# EAGLE board CT_schematic (EAGLE 7.6.0)

Size 100 x 80 mm. Coordinates in mm from the lower left corner, seen from the top.
Outline: 0,0 100,0 100,80 0,80 0,0
Copper layers (1*16): Top 0.035mm / dielectric 1.5mm / Bottom 0.035mm
Design rules "default": minimum track width 10mil, minimum drill 24mil, track to track 8mil, track to pad 8mil, pad to pad 8mil, via to via 8mil, smd to smd 8mil, copper to edge 40mil, drill to drill 8mil, minimum pad ring 10mil, minimum via ring 8mil, stop-mask expansion 4mil, vias tented up to drill 0mil, thermal gap 10mil

## Footprints (pad centres in the part's own frame; a part is rotated, then mirrored left to right if it is on the bottom)
C0603 = smd 0.8 x 0.8: 1 -0.762,0; 2 0.762,0
C0402 = smd 0.5 x 0.5: 1 -0.508,0; 2 0.508,0
C1210 = smd 1.2 x 2.5: 1 -1.524,0; 2 1.524,0
C1206 = smd 1.3 x 1.6: 1 -1.524,0; 2 1.524,0
L0603 = smd 0.8 x 0.8: 1 -0.762,0; 2 0.762,0
R0603 = smd 0.8 x 0.8: 1 -0.762,0; 2 0.762,0
LQFP32 = smd 0.54 x 0.85: 1 -2.8,-4.275; 2 -2,-4.275; 3 -1.2,-4.275; 4 -0.4,-4.275; 5 0.4,-4.275; 6 1.19,-4.275; 7 1.99,-4.275; 8 2.79,-4.275; 17 2.8,4.275; 18 2,4.275; 19 1.2,4.275; 20 0.4,4.275; 21 -0.4,4.275; 22 -1.2,4.275; 23 -2,4.275; 24 -2.8,4.275 | smd 0.85 x 0.54: 9 4.275,-2.8; 10 4.275,-2; 11 4.275,-1.2; 12 4.275,-0.4; 13 4.275,0.4; 14 4.275,1.2; 15 4.275,2; 16 4.275,2.8; 25 -4.275,2.8; 26 -4.275,2; 27 -4.275,1.2; 28 -4.275,0.4; 29 -4.275,-0.4; 30 -4.275,-1.2; 31 -4.275,-2; 32 -4.275,-2.8
SOIC-8 = smd 1.6 x 0.6: 1 -2.7,1.905 | smd 1.55 x 0.6: 2 -2.7,0.635; 3 -2.7,-0.635; 4 -2.7,-1.905; 5 2.7,-1.905; 6 2.7,-0.635; 7 2.7,0.635; 8 2.7,1.905
FCI_10118193-0001LF = smd 0.4 x 1.35: 1 -1.3,2.675; 2 -0.65,2.675; 3 0,2.675; 4 0.65,2.675; 5 1.3,2.675 | smd 1.6 x 1.4: 6 -3.2,2.45; 7 3.2,2.45 | smd 1.9 x 1.9: 8 -1.2,0; 9 1.2,0 | hole 0.5: -3.3,0; 3.3,0
SOT143B = smd 1 x 0.7: 1 -0.75,-1 | smd 0.6 x 0.7: 2 0.95,-1; 3 0.95,1; 4 -0.95,1
ABS07-32.768KHZ-7-T = smd 1.1 x 2.4: 1 -2.5,0; 2 0,0
SOIC-8_EP = smd 1.6 x 0.533: 1 -2.921,1.905; 2 -2.921,0.635; 3 -2.921,-0.635; 4 -2.921,-1.905; 5 2.921,-1.905; 6 2.921,-0.635; 7 2.921,0.635; 8 2.921,1.905 | smd 2.54 x 3.302: EPAD 0,0 | drill 0.406 pad 0.406: P$1 -0.508,0.635; P$2 0.381,0.635; P$3 -0.508,-0.635; P$4 0.381,-0.635
DFN8_2X3MC = smd 0.813 x 0.305: 1 -1.398,0.75; 2 -1.398,0.25; 3 -1.398,-0.25; 4 -1.398,-0.75; 5 1.398,-0.75; 6 1.398,-0.25; 7 1.398,0.25; 8 1.398,0.75 | smd 1.753 x 1.549: 9 0,0
JST-2-SMD = smd 1 x 4.6: 1 -1,-3.7; 2 1,-3.7 | smd 1.6 x 3.4: NC1 -3.4,1.5; NC2 3.4,1.5
SON-6 = smd 0.55 x 0.3: 1 -0.355,0.5 | smd 0.52 x 0.3: 2 -0.37,0; 3 -0.37,-0.5; 4 0.37,-0.5; 5 0.37,0; 6 0.37,0.5
SW_4-1437565-2 = smd 1.4 x 2.1: 1 -2.23,4.55; 2 -2.23,-4.55; 3 2.23,4.55; 4 2.23,-4.55
LGM67K-G1J2-24-Z = smd 0.8 x 1.4: A -2,0; C 0,0
NC7SZ125M5X = smd 1.3 x 0.7: 1 -1.3,0.95; 2 -1.3,0; 3 -1.3,-0.95; 4 1.3,-0.95; 5 1.3,0.95
DUMMY_PACKAGE_101 = drill 0.3: 1 0,-1; 2 1.5,-1; 3 3,-1

## Placement (x,y rotation side)
C1  1e-07  [C0603]  -38.1,46.99 0 top  (outside the outline)
C2  1e-07  [C0603]  -41.91,46.99 0 top  (outside the outline)
C3  1e-07  [C0603]  -45.72,46.99 0 top  (outside the outline)
C4  1e-07  [C0603]  -49.53,46.99 0 top  (outside the outline)
C5  4.7e-06  [C0603]  -34.29,46.99 0 top  (outside the outline)
C6  1e-08  [C0603]  -53.34,46.99 0 top  (outside the outline)
C7  1e-06  [C0603]  -57.15,46.99 0 top  (outside the outline)
C8  1e-11  [C0402]  -38.1,52.07 0 top  (outside the outline)
C9  1e-11  [C0402]  -41.91,52.07 0 top  (outside the outline)
C10  1e-08  [C0402]  -45.72,52.07 0 top  (outside the outline)
C11  1e-05  [C1210]  -16.51,36.83 0 top  (outside the outline)
C12  1e-05  [C1210]  -22.86,36.83 0 top  (outside the outline)
C13  1e-05  [C1210]  -29.21,36.83 0 top  (outside the outline)
C14  1e-05  [C1210]  -35.56,36.83 0 top  (outside the outline)
C15  1e-07  [C0402]  -49.53,52.07 0 top  (outside the outline)
C16  1e-05  [C1206]  -41.91,36.83 0 top  (outside the outline)
C17  1e-05  [C1206]  -48.26,36.83 0 top  (outside the outline)
C18  1e-08  [C0402]  -53.34,52.07 0 top  (outside the outline)
F1  240.0  [L0603]  -15.24,52.07 0 top  (outside the outline)
R1  10000.0  [R0603]  -34.29,41.91 0 top  (outside the outline)
R2  1000.0  [R0603]  -19.05,52.07 0 top  (outside the outline)
R3  910.0  [R0603]  -22.86,52.07 0 top  (outside the outline)
R4  4700.0  [R0603]  -26.67,52.07 0 top  (outside the outline)
R5  10000.0  [R0603]  -39.37,41.91 0 top  (outside the outline)
R6  10000.0  [R0603]  -44.45,41.91 0 top  (outside the outline)
R7  10000.0  [R0603]  -49.53,41.91 0 top  (outside the outline)
R8  10000.0  [R0603]  -54.61,41.91 0 top  (outside the outline)
R9  1402.2764227642  [R0603]  -19.05,41.91 0 top  (outside the outline)
R10  2200.0  [R0603]  -30.48,52.07 0 top  (outside the outline)
R11  10000.0  [R0603]  -15.24,46.99 0 top  (outside the outline)
R12  10000.0  [R0603]  -20.32,46.99 0 top  (outside the outline)
R13  82000.0  [R0603]  -25.4,46.99 0 top  (outside the outline)
R14  300000.0  [R0603]  -24.13,41.91 0 top  (outside the outline)
R15  120000.0  [R0603]  -29.21,41.91 0 top  (outside the outline)
R16  2000.0  [R0603]  -34.29,52.07 0 top  (outside the outline)
R17  10000.0  [R0603]  -30.48,46.99 0 top  (outside the outline)
U1  STM32L072KZT6  [LQFP32]  -24.13,7.62 0 top  (outside the outline)
U2  AT25256B-SSHL-T  [SOIC-8]  -39.37,20.32 0 top  (outside the outline)
U3  10118193-0001LF  [FCI_10118193-0001LF]  -49.53,17.78 0 top  (outside the outline)
U4  prtr5v0u2ax  [SOT143B]  -24.13,57.15 0 top  (outside the outline)
U5  ABS07-32.768KHZ-7-T  [ABS07-32.768KHZ-7-T]  -27.94,29.21 0 top  (outside the outline)
U6  MIC5234YME  [SOIC-8_EP]  -36.83,29.21 0 top  (outside the outline)
U7  MCP73831T-2ACI/MC  [DFN8_2X3MC]  -39.37,55.88 0 top  (outside the outline)
U8  S2B-PH-SM4-TB(LF)(SN)  [JST-2-SMD]  -22.86,21.59 0 top  (outside the outline)
U9  TPS3895ADRYR  [SON-6]  -33.02,55.88 0 top  (outside the outline)
U10  4-1437565-2  [SW_4-1437565-2]  -44.45,6.35 0 top  (outside the outline)
U11  Q65110A2395  [LGM67K-G1J2-24-Z]  -45.72,29.21 0 top  (outside the outline)
U12  nc7sz125m5x  [NC7SZ125M5X]  -53.34,35.56 0 top  (outside the outline)
U13  Dummy  [DUMMY_PACKAGE_101]  -30.48,57.15 0 top  (outside the outline)

## Library data of the parts
C1-C18 F1 R1-R17 U1-U13 = circuit_tree

## Nets
CLK_CRYSTAL_U1_2: C8.1 U1.2 U5.1
CLK_CRYSTAL_U1_3: C9.1 U1.3 U5.2
GND: C1.2 C2.2 C3.2 C4.2 C5.2 C6.2 C7.2 C8.2 C9.2 C10.2 C11.2 C12.2 C13.2 C14.2 C15.2 C16.2 C17.2 C18.2 R2.2 R5.2 R10.2 R13.2 R15.2 R16.2 U1.16 U1.32 U2.4 U3.5 U3.6 U3.7 U3.8 U3.9 U4.1 U6.7 U6.EPAD U7.6 U7.9 U8.2 U9.2 U11.C U12.1 U12.3 U13.1
INPUT_USBPOWER_5V: C16.1 R17.2 U3.1 U4.4 U7.1 U7.2
NET_U1_4: R4.1 U1.4 U12.4
NET_U1_5: C6.1 C7.1 F1.1 U1.5
NET_U1_29: R3.1 U1.29 U11.A
NET_U1_30: R1.1 U1.30 U10.3 U10.4
NET_U1_31: R5.1 U1.31
NET_U2_3: R6.1 U2.3
NET_U2_7: R8.1 U2.7
NET_U6_4: R9.2 R10.1 U6.4
NET_U7_5: R17.1 U7.5
NET_U7_8: R16.1 U7.8
NET_U9_1: R12.1 R13.1 U9.1
NET_U9_3: R14.2 R15.1 U9.3
NET_U9_4: R11.1 U9.4 U12.2
NET_U10_1: R2.1 U10.1 U10.2
PROC_PA0: U1.6 U13.2
PROC_PA1: U1.7 U13.3
PROC_SPI1_MISO: U1.12 U2.2
PROC_SPI1_MOSI: U1.13 U2.5
PROC_SPI1_NSS: R7.1 U1.10 U2.1
PROC_SPI1_SCK: U1.11 U2.6
PROC_USB_DM: U1.21 U3.2 U4.3
PROC_USB_DP: U1.22 U3.3 U4.2
VCC_S1_3V7: C11.1 C12.1 C17.1 U6.5 U6.8 U7.3 U7.4 U8.1
VCC_TIER1_1V8: C1.1 C2.1 C3.1 C4.1 C5.1 C10.1 C13.1 C14.1 C15.1 C18.1 F1.2 R1.2 R3.2 R4.2 R6.2 R7.2 R8.2 R9.1 R11.2 R12.2 R14.1 U1.1 U1.17 U2.8 U6.1 U9.6 U12.5

## Tracks (layer width: path | path; a pad name or v marks a point on that pad's centre or on a via)
CLK_CRYSTAL_U1_2  (2 unrouted)
CLK_CRYSTAL_U1_3  (2 unrouted)
GND  (42 unrouted)
INPUT_USBPOWER_5V  (5 unrouted)
NET_U1_4  (2 unrouted)
NET_U1_5  (3 unrouted)
NET_U1_29  (2 unrouted)
NET_U1_30  (3 unrouted)
NET_U1_31  (1 unrouted)
NET_U2_3  (1 unrouted)
NET_U2_7  (1 unrouted)
NET_U6_4  (2 unrouted)
NET_U7_5  (1 unrouted)
NET_U7_8  (1 unrouted)
NET_U9_1  (2 unrouted)
NET_U9_3  (2 unrouted)
NET_U9_4  (2 unrouted)
NET_U10_1  (2 unrouted)
PROC_PA0  (1 unrouted)
PROC_PA1  (1 unrouted)
PROC_SPI1_MISO  (1 unrouted)
PROC_SPI1_MOSI  (1 unrouted)
PROC_SPI1_NSS  (2 unrouted)
PROC_SPI1_SCK  (1 unrouted)
PROC_USB_DM  (2 unrouted)
PROC_USB_DP  (2 unrouted)
VCC_S1_3V7  (7 unrouted)
VCC_TIER1_1V8  (26 unrouted)